# Altium PCB creative2016.PcbDoc
Units mil, origin at the board's own origin, x right, y up, seen from the top; angles counter-clockwise.
Board outline 6000 x 4000 mil, 2 copper layers (Top Layer, Bottom Layer); 79 components, 107 nets, 372 pads, 74 vias.
Unrouted connection lines stored in the file: 80.
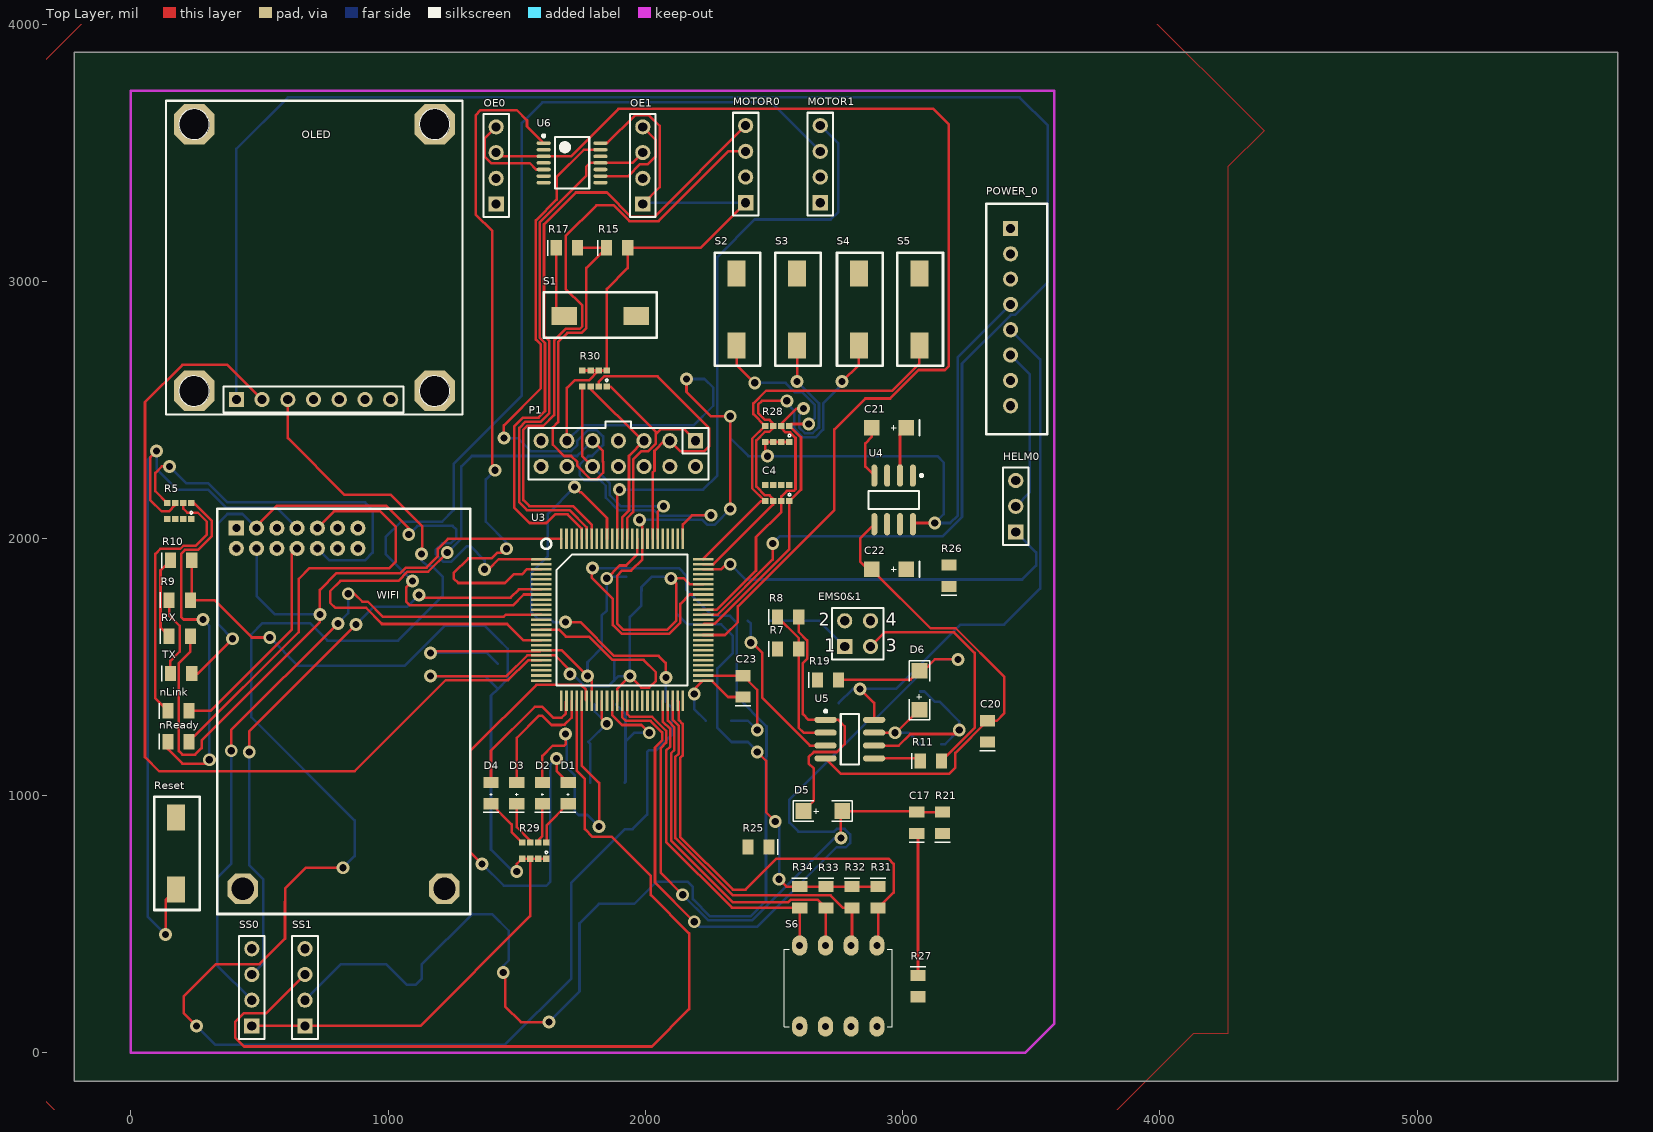
[diagram p0: Top Layer view]
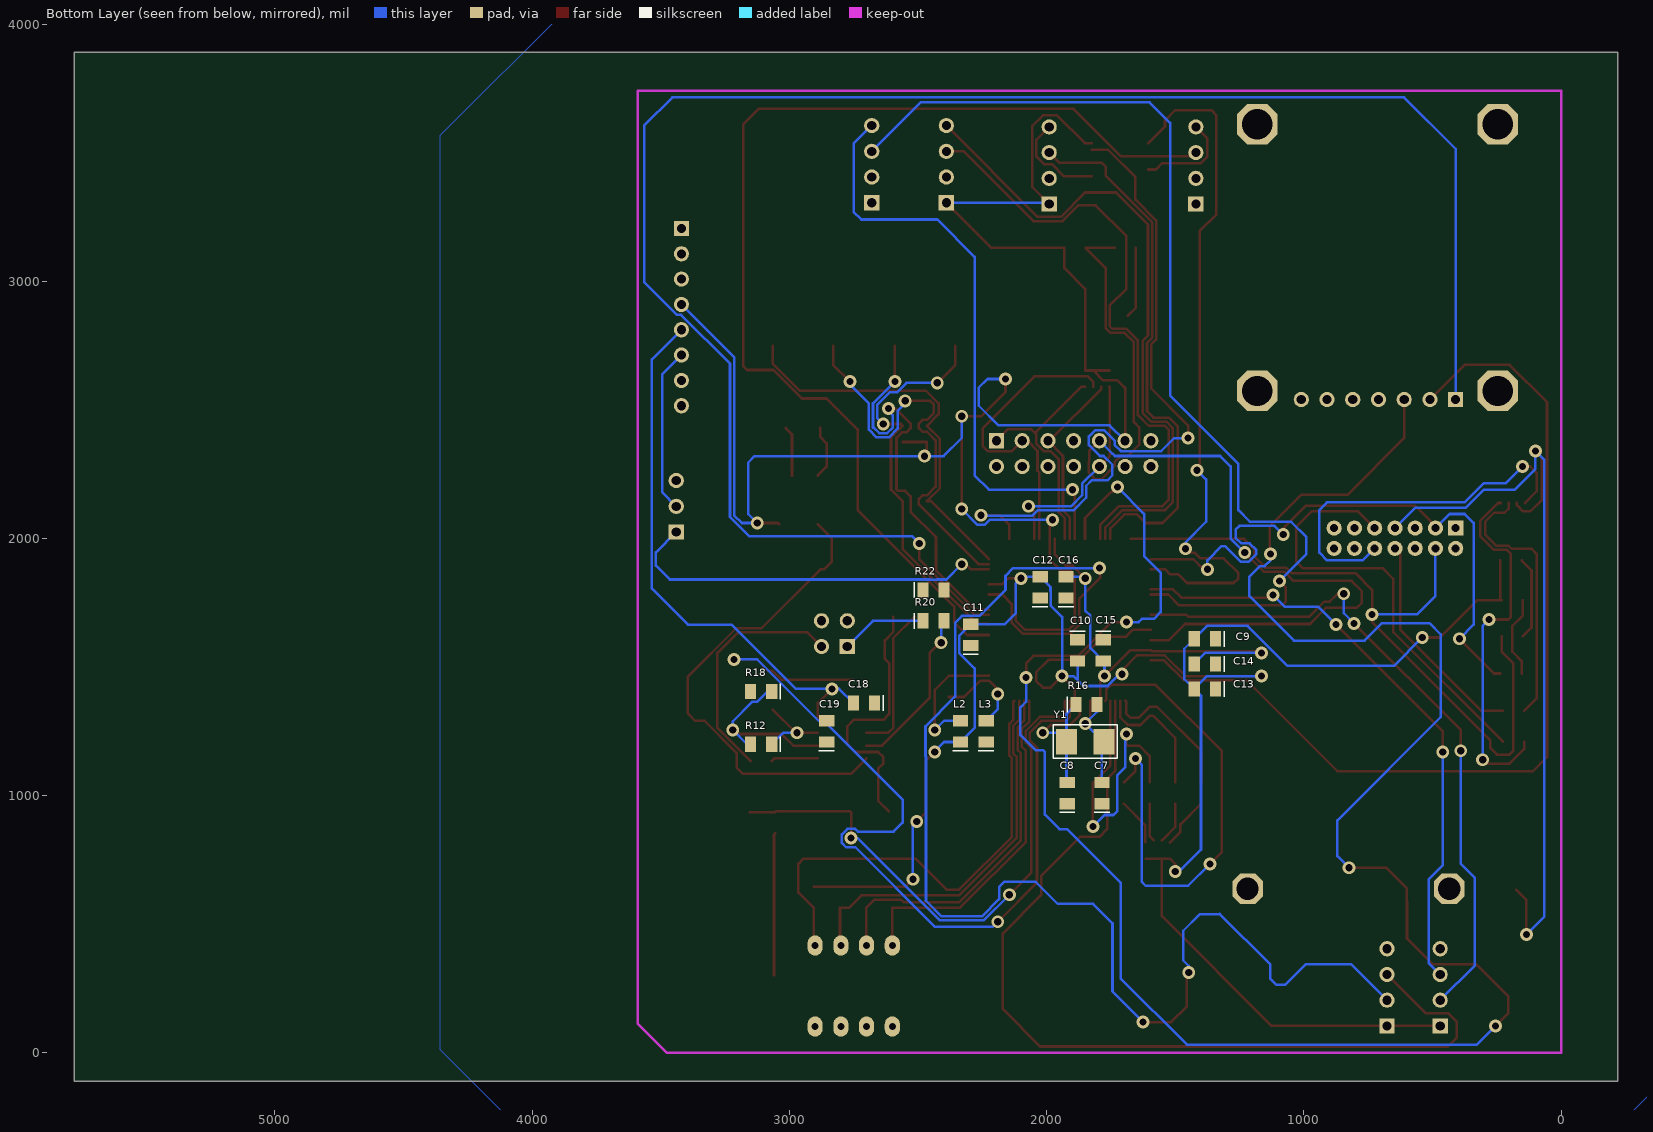
[diagram p1: Bottom Layer view, seen from below]

## Layer stack, top to bottom
Top Layer: signal copper 1.4
Dielectric: dielectric 12.6, FR-4, Dk 4.8
Bottom Layer: signal copper 1.4

## Board outline
-220,-110 5780,-110 5780,3890 -220,3890

## Design rules (kind name [scope] priority, off if disabled: settings)
Clearance [All] p1: gap=6
ComponentClearance [All] p1 off: gap=10 collisioncheckmode=3 verticalgap=10 showdistances=FALSE
MinimumSolderMaskSliver [All] p1: minsoldermaskwidth=1
PolygonConnect [All] p1: connectstyle=Relief reliefconductorwidth=10 reliefentries=4 polygonreliefangle="90 Angle" airgapwidth=10
RoutingVias [All] p1: holewidth=28 width=50 viastyle="Through Hole" minholewidth=28 minwidth=50 maxholewidth=28 maxwidth=50
SilkToSolderMaskClearance [IsPad] p1: minsilkscreentomaskgap=0 clearancetoexposedcopper=TRUE
SolderMaskExpansion [All] p1: expansion=4
Width [All] p1: maxlimit=10 minlimit=10 preferedwidth=10
25 further rules are at their usual default settings.

## Classes and differential pairs
component class WiFi: nLink nReady R5 R9 R10 Reset RX TX WIFI
component class Total: C4 C7 C8 C9 C10 C11 C12 C13 C14 C15 C16 C17 C18 C19 C20 C21 C22 C23 D1 D2 D3 D4 D5 D6 EMS0&1 HELM0 L2 L3 MOTOR0 MOTOR1 OE0 OE1 OLED P1 POWER_0 R7 R8 R11 R12 R15 R16 R17 R18 R19 R20 R21 R22 R25 R26 R27 R28 R29 R30 R31 R32 R33 R34 S1 S2 S3 S4 S5 S6 SS0 SS1 U3 U4 U5 U6 Y1

## Components (designator, comment, footprint, x,y, rotation, side; value= is the part's Value field where it differs from the comment)
C4 "Cap x4" 8P4R-0603 2560,2145 r180 top
C7 "Cap" "0805 2" 1785,1010 r90 bottom
C8 "Cap" "0805 2" 1920,1010 r90 bottom
C9 "Cap" "0805 2" 1385,1610 r0 bottom
C10 "Cap" "0805 2" 1880,1565 r270 bottom
C11 "Cap" "0805 2" 2295,1625 r90 bottom
C12 "Cap" "0805 2" 2025,1810 r90 bottom
C13 "Cap" "0805 2" 1385,1415 r0 bottom
C14 "Cap" "0805 2" 1385,1512.5 r0 bottom
C15 "Cap" "0805 2" 1780,1565 r270 bottom
C16 "Cap" "0805 2" 1925,1810 r90 bottom
C17 "Cap" "0805 2" 3055,895 r90 top
C18 "Cap" "0805 2" 2710,1360 r0 bottom
C19 "Cap" "0805 2" 2855,1250 r90 bottom
C20 "Cap" "0805 2" 3330,1250 r90 top
C21 "Cap Pol" "1206 Pol 3" 3015,2430 r180 top
C22 "Cap Pol" "1206 Pol 3" 3015,1880 r180 top
C23 "Cap" "0805 2" 2380,1425 r90 top
D1 "LED" "0805 Pol 3" 1700,1010 r90 top
D2 "LED" "0805 Pol 3" 1600,1010 r90 top
D3 "LED" "0805 Pol 3" 1500,1010 r90 top
D4 "LED" "0805 Pol 3" 1400,1010 r90 top
D5 "Diode" SMA 2690,940 r0 top
D6 "Diode" SMA 3065,1410 r90 top
EMS0&1 "Header 2X2" HDR2X2 2775,1580 r0 top
HELM0 "Header 3" HDR1X3 3440,2025 r90 top
L2 "Bead" "0805 2" 2335,1250 r90 bottom
L3 "Bead" "0805 2" 2235,1250 r90 bottom
MOTOR0 "Header 4" HDR1X4 2390,3305 r90 top
MOTOR1 "Header 4" HDR1X4 2680,3305 r90 top
nLink "LED" "0805 2" 185,1330 r0 top
nReady "LED" "0805 2" 185,1210 r0 top
OE0 "Header 4" HDR1X4 1420,3300 r90 top
OE1 "Header 4" HDR1X4 1990,3300 r90 top
OLED "Header 7X1" OLED-chiusir 1290,3705 r180 top
P1 "Header 7X2" "Header 2X7" 2195,2380 r180 top
POWER_0 "Header 8" XH2.54_8 3420,3205 r270 top
R5 "R x4" 8P4R-0603 235,2075 r180 top
R7 "Res" "0805 2" 2555,1570 r0 top
R8 "Res" "0805 2" 2555,1695 r0 top
R9 "Res" "0805 2" 190,1760 r0 top
R10 "Res" "0805 2" 195,1915 r0 top
R11 "Res" "0805 2" 3110,1135 r0 top
R12 "Res" "0805 2" 3110,1200 r0 bottom
R15 "Res" "0805 2" 1890,3130 r0 top
R16 "Res" "0805 2" 1845,1355 r180 bottom
R17 "Res" "0805 2" 1695,3130 r0 top
R18 "Res" "0805 2" 3110,1405 r0 bottom
R19 "Res" "0805 2" 2710,1450 r0 top
R20 "Res" "0805 2" 2440,1680 r180 bottom
R21 "Res" "0805 2" 3155,895 r90 top
R22 "Res" "0805 2" 2440,1800 r180 bottom
R25 "Res" "0805 2" 2440,800 r180 top
R26 "Res" "0805 2" 3180,1855 r90 top
R27 "Res" "0805 2" 3060,260 r270 top
R28 "R x4" 8P4R-0603 2560,2375 r180 top
R29 "R x4" 8P4R-0603 1615,755 r180 top
R30 "R x4" 8P4R-0603 1850,2590 r180 top
R31 "Res2" "0805 2" 2905,605 r270 top
R32 "Res2" "0805 2" 2803.33,605 r270 top
R33 "Res2" "0805 2" 2701.67,605 r270 top
R34 "Res2" "0805 2" 2600,605 r270 top
Reset "Switch-1" 轻触按键 175,635 r90 top
RX "LED" "0805 2" 190,1620 r0 top
S1 "Switch-1" 轻触按键 1965,2865 r180 top
S2 "Switch-1" 轻触按键 2355,2750 r90 top
S3 "Switch-1" 轻触按键 2590,2750 r90 top
S4 "Switch-1" 轻触按键 2830,2750 r90 top
S5 "Switch-1" 轻触按键 3065,2750 r90 top
S6 "SW-DIP4" Switch_4 2750,260 r180 top
SS0 "Header 4" HDR1X4 470,105 r90 top
SS1 "Header 4" HDR1X4 676.67,105 r90 top
TX "LED" "0805 2" 195,1475 r0 top
U3 "MPC5604BFMLL" LQ_LQFP100 1595,1920 r0 top
U4 "LM2662" SOIC-8 2965,2150 r270 top
U5 "NE5532" SOIC-8 2795,1220 r0 top
U6 "CD4013B" TSOP-14 1715,3460 r0 top
WIFI "Header 7X2" USR-WIFI232-X 335,2115 r270 top
Y1 "XTAL" "5032 2" 1850,1210 r0 bottom

## Footprints (in the part's own frame and the unit in brackets; to place one, negate y for a bottom-side part, rotate by r counter-clockwise, add the part's x,y. Pads: shape width x height; smd on the part's side, far side on the other; paste and mask are expansions set on the pad)
8P4R-0603 [mm]
  rect 0.64x0.6 smd: 1(0,0) 2(0,-1.6) 3(0.8,0) 4(0.8,-1.6) 5(1.6,0) 6(1.6,-1.6) 7(2.4,0) 8(2.4,-1.6)
  silkscreen extent -0.13,-0.76 0.13,-0.51
"0805 2" [mm] "Chip Resistor; Body 2.0 x 1.3 mm (LxW typ)"
  rect 1.1x1.5 smd: 1(-1.05,0) 2(1.05,0)
  silkscreen extent -1.91,-0.76 -1.91,0.76
"0805 Pol 3" [mm] "Chip Resistor; Body 2.0 x 1.3 mm (LxW typ)"
  rect 1.1x1.5 smd: 1(-1.05,0) 2(1.055,0)
  silkscreen extent -1.91,-0.76 0,0.76
"1206 Pol 3" [mil]
  rect 60x60 smd: 1(0,0) 2(135,0)
  silkscreen extent -50,-30 60,30
"5032 2" [mil]
  rect 80x100 smd: 1(-72.83,0) 2(72.83,0)
  silkscreen extent -125,-65 125,65
HDR1X3 [mm] "Connector; Header; 3 Position"
  rect 1.5x1.5 hole 0.9: 1(0,0)
  round 1.5 hole 0.9: 2(2.54,0) 3(5.08,0)
  silkscreen extent -1.27,-1.27 6.35,1.27
HDR1X4 [mm] "Connector; Header; 4 Position"
  rect 1.5x1.5 hole 0.9: 1(0,0)
  round 1.5 hole 0.9: 2(2.54,0) 3(5.08,0) 4(7.62,0)
  silkscreen extent -1.27,-1.27 8.89,1.27
HDR2X2 [mm] "Connector; Header; 2x2 Position"
  rect 1.5x1.5 hole 0.9: 1(0,0)
  round 1.5 hole 0.9: 2(0,2.54) 3(2.54,0) 4(2.54,2.54)
  silkscreen extent -1.27,-1.27 3.81,3.81
"Header 2X7" [mm] "Connector; Header; 7x2 Position"
  rect 1.5x1.5 hole 0.9: 1(0,0)
  round 1.5 hole 0.9: 2(0,2.54) 3(2.54,0) 4(2.54,2.54) 5(5.08,0) 6(5.08,2.54) 7(7.62,0) 8(7.62,2.54) 9(10.16,0) 10(10.16,2.54) 11(12.7,0) 12(12.7,2.54) 13(15.24,0) 14(15.24,2.54)
  silkscreen extent -1.27,-1.9 16.51,3.81
LQ_LQFP100 [mm]
  oval 2x0.254 smd: 1(0,0)
  rect 2x0.254 smd: 2(0,-0.5) 3(0,-1) 4(0,-1.5) 5(0,-2) 6(0,-2.5) 7(0,-3) 8(0,-3.5) 9(0,-4) 10(0,-4.5) 11(0,-5) 12(0,-5.5) 13(0,-6) 14(0,-6.5) 15(0,-7) 16(0,-7.5) 17(0,-8) 18(0,-8.5) 19(0,-9) 20(0,-9.5) 21(0,-10) 22(0,-10.5) 23(0,-11) 24(0,-11.5) 25(0,-12) 51(16,-12) 52(16,-11.5) 53(16,-11) 54(16,-10.5) 55(16,-10) 56(16,-9.5) 57(16,-9) 58(16,-8.5) 59(16,-8) 60(16,-7.5) 61(16,-7) 62(16,-6.5) 63(16,-6) 64(16,-5.5) 65(16,-5) 66(16,-4.5) 67(16,-4) 68(16,-3.5) 69(16,-3) 70(16,-2.5) 71(16,-2) 72(16,-1.5) 73(16,-1) 74(16,-0.5) 75(16,0)
  rect 0.254x2 smd: 26(2,-14) 27(2.5,-14) 28(3,-14) 29(3.5,-14) 30(4,-14) 31(4.5,-14) 32(5,-14) 33(5.5,-14) 34(6,-14) 35(6.5,-14) 36(7,-14) 37(7.5,-14) 38(8,-14) 39(8.5,-14) 40(9,-14) 41(9.5,-14) 42(10,-14) 43(10.5,-14) 44(11,-14) 45(11.5,-14) 46(12,-14) 47(12.5,-14) 48(13,-14) 49(13.5,-14) 50(14,-14) 76(14,2) 77(13.5,2) 78(13,2) 79(12.5,2) 80(12,2) 81(11.5,2) 82(11,2) 83(10.5,2) 84(10,2) 85(9.5,2) 86(9,2) 87(8.5,2) 88(8,2) 89(7.5,2) 90(7,2) 91(6.5,2) 92(6,2) 93(5.5,2) 94(5,2) 95(4.5,2) 96(4,2) 97(3.5,2) 98(3,2) 99(2.5,2) 100(2,2)
  silkscreen extent 0,-12.46 14.46,2
OLED-chiusir [mm]
  oct 4x4 hole 3: 0(2.778,28.745) 0(2.778,2.395) 0(26.528,28.745) 0(26.528,2.395)
  rect 1.5x1.5 hole 0.9: 1(22.352,29.591)
  round 1.5 hole 0.9: 2(19.812,29.591) 3(17.272,29.591) 4(14.732,29.591) 5(12.192,29.591) 6(9.652,29.591) 7(7.112,29.591)
  silkscreen extent 0,0.08 29.3,31.06
SMA [mm] "Chip Resistor; Body 2.0 x 1.3 mm (LxW typ)"
  rect 1.555x1.57 smd: 1(-1.915,0) 2(1.915,0)
  silkscreen extent -2.92,-1.02 2.92,1.02
SOIC-8 [mm] "SOIC, 8-Leads, Body 4.90x3.90mm, Pitch 1.27mm, IPC Medium Density"
  oval 2.2x0.6 smd: 1(-2.4,1.905) 2(-2.4,0.635) 3(-2.4,-0.635) 4(-2.4,-1.905) 5(2.4,-1.905) 6(2.4,-0.635) 7(2.4,0.635) 8(2.4,1.905)
  silkscreen extent -2.52,-2.5 0.9,2.88
Switch_4 [mm] "拨码开关"
  oval 1.5x2 hole 0.7: 1(-3.81,4) 2(-1.27,4) 3(1.27,4) 4(3.81,4) 5(3.81,-4) 6(1.27,-4) 7(-1.27,-4) 8(-3.81,-4)
  silkscreen extent -5.33,-3.62 5.33,4
TSOP-14 [mm] "TSOP, 14-Leads, Body 5.00x4.40mm, Pitch 0.65mm, IPC High Density"
  oval 1.4x0.35 smd: 1(-2.8,1.95) 2(-2.8,1.3) 3(-2.8,0.65) 4(-2.8,0) 5(-2.8,-0.65) 6(-2.8,-1.3) 7(-2.8,-1.95) 8(2.8,-1.95) 9(2.8,-1.3) 10(2.8,-0.65) 11(2.8,0) 12(2.8,0.65) 13(2.8,1.3) 14(2.8,1.95)
  silkscreen extent -2.92,-2.55 1.7,2.8
USR-WIFI232-X [mm]
  oct 3x3 hole 2.2: 0(37.5,22.45) 0(37.5,2.55)
  rect 1.5x1.5 hole 0.8: 1(1.9,1.9)
  round 1.5 hole 0.8: 2(3.9,1.9) 3(1.9,3.9) 4(3.9,3.9) 5(1.9,5.9) 6(3.9,5.9) 7(1.9,7.9) 8(3.9,7.9) 9(1.9,9.9) 10(3.9,9.9) 11(1.9,11.9) 12(3.9,11.9) 13(1.9,13.9) 14(3.9,13.9)
  silkscreen extent 0,0 40,25
XH2.54_8 [mm]
  rect 1.5x1.5 hole 0.9: 1(0,0)
  round 1.5 hole 0.9: 2(2.5,0) 3(5,0) 4(7.5,0) 5(10,0) 6(12.5,0) 7(15,0) 8(17.5,0)
  silkscreen extent -2.45,-2.4 20.32,3.6
轻触按键 [mil]
  rect 100x70 smd: 1(0,0) 2(280,0)
  silkscreen extent -79,-92 361,85

## Part data
C7 C8 C9 C10 C11 C12 C13 C14 C15 C16 C17 C18 C19 C20 C23: "Capacitor"
C21 C22: "Polarized Capacitor (Radial)"
D5 D6: "3 Amp General Purpose Rectifier"
EMS0&1: "Header, 2-Pin, Dual row"
HELM0: "Header, 3-Pin"
MOTOR0 MOTOR1 OE0 OE1 SS0 SS1: "Header, 4-Pin"
OLED: library part OLED-chiusir
P1: "Header, 7-Pin, Dual row"
POWER_0: "Header, 8-Pin"
R5 R28 R29 R30: library part "Res x4"
R7 R8 R9 R10 R11 R12 R15 R16 R17 R18 R19 R20 R21 R22 R25 R26 R27 R31 R32 R33 R34: "Resistor"
S6: library part SWITCH-4
U6: "CMOS Dual 'D'-Type Flip-Flop"
WIFI: library part USR-WIFI232-X
Y1: "Crystal Oscillator"

## Via types
v1: diameter 50, hole 28, Top Layer to Bottom Layer, 74 vias

## Nets (pads, with @x,y where several pads share a name; then routed paths per layer and width w, separated by ;. In a path a pad name is that pad's centre, name@x,y a point inside that pad or via, vN(x,y) a via of type N, cw(c..) or ccw(c..) an arc to the next point about the centre after c; other vN are vias at no path point)
BAT_3.3(1): OLED.6 POWER_0.2 R5.1 R5.3 R5.5 R5.7 WIFI.2
BAT_3.3(2): POWER_0.3
BAT_5(1): C9.2 C10.2 C11.2 C12.2 C13.2 L2.1 MOTOR0.1 MOTOR1.1 OE0.1 OE1.1 P1.11 POWER_0.4 R9.2 R10.2 R15.2 R28.1 R28.3 R28.5 R28.7 R29.1 R29.3 R29.5 R29.7 R30.2 R30.4 R30.6 R30.8 R31.1 R32.1 R33.1 R34.1 SS0.1 SS1.1 U3.15 U3.20 U3.37 U3.70 U3.84 U4.8 U6.14 | length 16430.7
  Top Layer w10: R10.2 236.34,1765 R9.2 325,1760 470,1615 v1(540,1615) ; SS0.1 SS1.1 1125,105 1552.01,532.01 R29.5 ; v1(1165,1465) 1460,1465 1540.99,1545.99 U3.20 1649.01,1545.99 1707.5,1487.5 v1(1707.5,1472.5) ; v1(1500,705) 1500,734.49 R29.7 R29.5 ; U3.15 1665.59,1644.41 1691.31,1618.69 1781.06,1618.69 1871.75,1528 1992.91,1528 2041,1479.91 2041,1446 2015,1420 1985,1420 v1(1940,1465) 1890.28,1415.28 U3.37 ; R29.1 R29.3 R29.5 ; P1.11 1695,2585 1725,2615 1780.51,2615 R30.4 ; R30.8 R30.6 R30.4 ; U6.14 1851.77,3536.77 1960,3645 2015,3645 2056,3604 2056,3366 OE1.1 ; v1(1977.5,2072.5) 1977.5,2067.5 1988.7,2056.3 U3.84 1988.7,1918.7 1945,1875 1910,1875 1890,1855 1890,1670 1915,1645 2085,1645 2120,1680 2120,1825 v1(2100,1845) 2150,1845 2173.42,1821.58 U3.70 ; v1(2160,2620) 2160,2570 2255,2475 v1(2330,2475) v1(2330,2114.09) ; MOTOR0.1 2215,3130 R15.2 1931.34,3051.34 1850,2970 R30.2 R30.4 ; v1(2435,1170) 2470,1135 2470,935 v1(2505,900) ; v1(2475,2320) 2465.51,2329.49 R28.7 R28.5 R28.3 R28.1 ; v1(2520,675) 2548.66,646.34 R34.1 R33.1 R32.1 R31.1 ; U4.8 3044.49,2060 v1(3125,2060)
  Bottom Layer w10: v1(540,1615) 650,1505 1064.09,1505 1219.09,1660 1376.34,1660 C9.2 1465,1571.34 1465,1453.66 C13.2 ; v1(1165,1465) 1376.34,1465 C13.2 ; v1(1500,705) 1485,705 1400,790 1400,1388.66 C13.2 ; P1.11 1755,2440 2188,2440 2264,2516 2264,2586 2230,2620 v1(2160,2620) ; v1(1707.5,1472.5) 1716.59,1472.5 1762.59,1426.5 1857.41,1426.5 1878.5,1447.59 ; C10.2 1878.5,1522.16 1878.5,1447.59 ; v1(1977.5,2072.5) 2221.59,2072.5 2240.09,2054 2269.91,2054 v1(2330,2114.09) v1@2330,2115 ; OE1.1 1995,3305 MOTOR0.1 ; v1(2330,2475) 2330,2391 2401,2320 v1(2475,2320) 3135,2320 3160,2295 3160,2095 v1(3125,2060) 3185,2060 3215,2090 3215,2704.72 POWER_0.4 ; v1@2432.32,1175 2398.66,1208.66 L2.1 2280,1263.66 2280,1495 2340,1555 2340,1621.34 C11.2 2163.66,1666.34 2120,1710 2120,1825 v1(2100,1845) 2093.66,1851.34 C12.2 1985,1811.34 1985,1795.93 1984.47,1795.4 1984.47,1739.47 1940,1695 v1(1940,1465) 1895.91,1465 1878.5,1447.59 ; v1(2505,900) 2520,885 v1(2520,675)
BAT_5(2): C18.2 POWER_0.5 U5.8 | length 2164.5
  Top Layer w10: v1(2835,1415) 2889.49,1360.51 U5.8
  Bottom Layer w10: C18.2 2806.34,1415 v1(2835,1415) 2975,1415 3225,1665 3395,1665 3535,1805 3535,2696.3 POWER_0.5
BAT_6(1): HELM0.2 POWER_0.6 | length 641.7
  Bottom Layer w10: POWER_0.6 3495,2637.87 3495,2180 HELM0.2
BAT_6(2): POWER_0.7
BAT_7.2: POWER_0.1
BAT_-5: C20.2 C22.2 U4.5 U5.4 | length 1905.9
  Top Layer w10: U5.4 2760.51,1085 3180,1085 3205,1110 3205,1166.34 C20.2 3366.34,1291.34 3395,1320 3395,1462.63 3206.63,1651 3109,1651 C22.2 2865,1880 2835,1910 2835,2000.51 U4.5
EXTAL: C8.2 R16.1 U3.36 Y1.2 | length 654.2
  Top Layer w10: U3.36 1870.59,1314.41 1910,1275 1985,1275 v1(2015,1245)
  Bottom Layer w10: R16.1 1922.83,1318.5 Y1.2 ; C8.2 1922.83,1054.17 Y1.2 ; v1(2015,1245) 1957.83,1245 Y1.2
GND: C4.2 C4.4 C4.6 C4.8 C7.1 C8.1 C9.1 C10.1 C11.1 C12.1 C13.1 C14.1 C15.1 C16.1 C22.1 HELM0.3 L3.1 MOTOR0.2 MOTOR1.2 OE0.2 OE1.2 OLED.7 P1.2 P1.4 P1.6 P1.8 P1.12 P1.14 POWER_0.8 R22.2 R25.2 R26.2 R27.2 Reset.2 S1.1 S2.2 S3.2 S4.2 S5.2 S6.1 S6.2 S6.3 S6.4 SS0.4 SS1.4 U3.14 U3.16 U3.18 U3.33 U3.35 U3.69 U3.83 U3.86 U4.3 U4.6 U6.4 U6.6 U6.7 U6.8 U6.10 WIFI.1
GND_ANALOG: C17.1 C18.1 C19.1 C20.1 EMS0&1.2 EMS0&1.4 R7.1 R18.2 R19.1 R21.1 R22.1 R25.1 R26.1 R27.1 | length 554.4
  Top Layer w10: C17.1 3060,848.66 R27.1
MCU_RDY: P1.13
NetC21_1: C21.1 U4.2 | length 195.9
  Top Layer w10: U4.2 2990,2405 C21.1
NetC21_2: C21.2 U4.4 | length 210.4
  Top Layer w10: C21.2 2880,2395 2855,2370 2855,2279.49 U4.4
NetD1_1: D1.1 R29.2 | length 184.5
  Top Layer w10: R29.2@1616,818.99 1616,884.66 D1.1
NetD2_1: D2.1 R29.4 | length 149
  Top Layer w10: R29.4@1583.5,826.46 1600,842.96 D2.1
NetD3_1: D3.1 R29.6 | length 163.7
  Top Layer w10: D3.1 1500,878.47 R29.6@1552.01,826.46
NetD4_1: D4.1 R29.8 | length 200.6
  Top Layer w10: D4.1 1480,888.66 1480,858.5 R29.8
NetD5_1: D5.1 R8.2 U5.1 | length 1045.9
  Top Layer w10: R8.2 2596.34,1636.74 2628.99,1604.08 2628.99,1531.65 2612.34,1515 2612.34,1317.66 2635,1295 U5.1 2750,1295 2775,1270 2775,1200 2745,1170 2655,1170 2635,1150 2635,1125 2655,1105 2655,980.39 D5.1
NetD6_1: D6.1 R12.1 U5.7 | length 329.9
  Top Layer w10: U5.7 v1(2970,1245) 2975.39,1245 D6.1
  Bottom Layer w10: v1(2970,1245) 3023.66,1245 R12.1
NetEMS0&1_1: EMS0&1.1 R20.1 | length 335.1
  Bottom Layer w10: R20.1 2675,1680 EMS0&1.1
NetEMS0&1_3: EMS0&1.3 R11.2 | length 934.2
  Top Layer w10: EMS0&1.3 2930,1635 3200,1635 3280,1555 3280,1263.97 3151.34,1135.3 R11.2
NetnLink_1: nLink.1 R5.4 | length 1045.5
  Top Layer w10: nLink.1 95,1378.66 95,1940 115,1960 191.97,1960 203.5,1971.53 251.53,1971.53 295,2015 295,2065 260,2100 220,2100 203.5,2116.5 R5.4
NetnLink_2: nLink.2 WIFI.8 | length 854.3
  Top Layer w10: nLink.2 310,1330 625,1645 625,1940.43 WIFI.8
NetnReady_1: nReady.1 R5.2 | length 1425
  Top Layer w10: nReady.1 143.66,1181.34 200,1125 290,1125 v1(305,1140) ; R5.2 244.64,2137.99 315,2067.63 315,2010 260.53,1955.53 210.13,1955.53 203.68,1949.08 203.68,1948.68 195,1940 195,1695 205,1685 v1(280,1685)
  Bottom Layer w10: v1(280,1685) 305,1660 v1(305,1140)
NetnReady_2: nReady.2 WIFI.9 | length 1706.4
  Top Layer w10: nReady.2 652.5,1636.16 652.5,1842.5 695,1885 1005,1885 1030,1910 1030,2045 970,2105 789.57,2105 WIFI.9
NetOE0_4: OE0.4 U6.5 | length 384.4
  Top Layer w10: OE0.4 1375,3555 1375,3485 1400.53,3459.47 1550.53,3459.47 1575.59,3434.41 U6.5
NetOE1_4: OE1.4 U6.9 | length 382
  Top Layer w10: U6.9 1933.82,3408.82 1980,3455 2010,3455 2040,3485 2040,3550 OE1.4
NetR5_6: R5.6 Reset.1 WIFI.7 | length 3160.9
  Top Layer w10: v1(100,2340) 75,2315 75,2150 120,2105 147.49,2105 172.01,2129.52 R5.6 ; v1(135,460) 135,595 Reset.1
  Bottom Layer w10: v1(135,460) 65,530 65,2305 v1(100,2340) 100,2270 180,2190 300,2190 370,2120 566.22,2120 WIFI.7
NetR5_8: R5.8 WIFI.10 | length 1473.5
  Top Layer w10: R5.8 95,2183.5 95,2255 120,2280 v1(150,2280)
  Bottom Layer w10: v1(150,2280) 215,2215 300,2215 375,2140 910,2140 940,2110 940,1945 910,1915 771.22,1915 WIFI.10
NetR7_2: R7.2 R8.1 U5.2 | length 577.5
  Top Layer w10: R8.1 2596.34,1612.32 R7.2 2596.34,1263.66 2615,1245 U5.2
NetR9_1: R9.1 TX.1 | length 317.2
  Top Layer w10: R9.1 148.66,1701.34 190,1660 190,1560 153.66,1523.66 TX.1
NetR10_1: R10.1 RX.1 | length 325
  Top Layer w10: RX.1 115,1653.66 115,1876.34 R10.1
NetR11_1: R11.1 U5.5 | length 183.3
  Top Layer w10: U5.5 3058.66,1145 R11.1
NetR12_2: R12.2 R18.1 U5.6 | length 680.5
  Top Layer w10: U5.6 2985,1195 3030,1240 3205,1240 v1(3220,1255)
  Bottom Layer w10: R18.1 3084.6,1405 3125.13,1364.47 3145,1364.47 3220,1289.47 v1(3220,1255) 3165,1200 R12.2
NetR17_1: R17.1 S1.2 | length 278
  Top Layer w10: R17.1 1653.66,2896.34 S1.2
NetR20_2: R20.2 U5.3 | length 648.4
  Top Layer w10: v1(2410,1595) 2415,1595 2455,1555 2455,1380 2640,1195 U5.3
  Bottom Layer w10: R20.2 2410,1668.66 v1(2410,1595)
PA0: SS0.2 U3.12 | length 2638
  Top Layer w10: v1(390,1175) 390,1255 v1(805,1670) ; v1(845,1785) 869.09,1785 900.09,1754 921,1754 980,1695 1448.07,1695 1456.53,1703.47 U3.12
  Bottom Layer w10: v1(390,1175) 390,735 335,680 335,340 SS0.2 ; v1(805,1670) 845,1710 v1(845,1785)
PA1: SS0.3 U3.7 | length 2358.3
  Top Layer w10: v1(460,1170) 460,1250 v1(875,1665) ; v1(1120,1780) 1125,1780 1135,1770 1476.22,1770 1508.11,1801.89 U3.7
  Bottom Layer w10: v1(460,1170) 460,730 515,675 515,350 SS0.3 ; v1(875,1665) 945,1735 1075,1735 v1(1120,1780)
PA3: SS1.2 U3.68 | length 5430.3
  Top Layer w10: v1(1447.5,312.5) 1455,305 1455,181 1516,120 v1(1625,120) ; v1(1795,1885) 1792,1882 1792,1847 1874,1765 1874,1663.37 1908.37,1629 2091.63,1629 2136,1673.37 2136,1746 2172.21,1782.21 U3.68
  Bottom Layer w10: SS1.2 817.19,345.53 992.16,345.53 1073.21,264.47 1106.79,264.47 1130.53,288.21 1130.53,343.16 1327.37,540 1328.37,539 1405,539 1469,475 1469,360 1447.5,338.5 v1(1447.5,312.5) ; v1(1625,120) 1744,239 1744,504 1819.47,579.47 1956.79,579.47 2042.31,665 2165,665 2185,645 2185,597.63 2251.63,531 2408.37,531 2469,591.63 2469,1152.09 2471,1154.09 2471,1269.91 2356,1384.91 2356,1672.08 2329.08,1698.99 2261.01,1698.99 2160,1800 2160,1855 2130,1885 v1(1795,1885)
PA4: SS1.3 U3.29 | length 3671.7
  Top Layer w10: SS1.3 526.67,155 440,155 405,120 405,60 440,25 2025,25 2170,170 2170,465 2021.5,613.5 2021.5,688.5 1870,840 1795,840 1765,870 1765,1065 1732.8,1097.2 U3.29
PA8: U3.72
PA9: HELM0.1 U3.73 | length 1512.5
  Top Layer w10: U3.73 2295.63,1880.63 2315,1900 v1(2330,1900)
  Bottom Layer w10: v1(2330,1900) 2389.47,1840.53 2424.87,1840.53 2425.4,1840 2454.6,1840 2455.13,1840.53 3464.53,1840.53 3519,1895 3519,1946 HELM0.1
PA10: C4.5 R28.6 S4.1 U3.74 | length 1625.8
  Top Layer w10: U3.74 2265.16,1900.32 2497.01,2132.16 C4.5 2497.01,2153.47 2482.67,2167.81 2465.73,2167.81 2431.57,2201.97 2431.57,2381.42 2465.07,2414.93 2482.41,2414.93 2497.01,2429.52 R28.6 2497.01,2446.46 2482.67,2460.8 2465.33,2460.8 2438.07,2488.07 2438.07,2520.44 2452.63,2535 v1(2550,2535) ; v1(2765,2610) 2830,2675 S4.1
  Bottom Layer w10: v1(2550,2535) 2550,2525 2579,2496 2579,2427.46 2613.46,2393 2660.63,2393 2691,2423.37 2691,2525 2765,2599 v1(2765,2610)
PA11: C4.7 R28.8 S5.1 U3.75 | length 1554.1
  Top Layer w10: U3.75 2449.92,2145 C4.7 2415.51,2195 2415.51,2387.99 R28.8 2420,2483.5 2420,2525 2470,2575 2471,2574 2959,2574 3065,2680 S5.1
PA12: D1.2 U3.31 | length 1975.1
  Top Layer w10: v1(1365,735) 1320,780 1320,1175 1576,1431 1750.23,1431 1768.48,1412.75 1768.48,1372.51 U3.31 ; v1(1655,1145) 1655,1096.54 D1.2
  Bottom Layer w10: v1(1365,735) 1450,650 1615,650 1631,666 1631,1121 v1(1655,1145)
PA13: D2.2 U3.30 | length 1203.2
  Top Layer w10: D2.2 1600,1155 1640,1195 1685,1195 1690,1200 v1(1690,1240) ; U3.30 1752.48,1117.52 1820,1050 v1(1820,880)
  Bottom Layer w10: v1(1690,1240) 1695,1235 1695,1110 1725,1080 1725,940 1740,925 1775,925 v1(1820,880)
PA14: D3.2 U3.28 | length 513.6
  Top Layer w10: D3.2 1500,1225 1585,1310 1600,1310 1635,1275 1674.09,1275 1675.09,1276 1686,1276 1713.11,1303.11 U3.28
PA15: D4.2 U3.27 | length 558.7
  Top Layer w10: D4.2 1400,1175 1570,1345 1600,1345 1641.29,1303.71 1675,1303.71 1689.74,1318.45 1689.74,1365.13 U3.27
PB0: U3.23
PB1: U3.24
PB2: RX.2 U3.100 WIFI.4 | length 2873.9
  Top Layer w10: RX.2 231.34,1560.02 186.32,1515 186.32,1173.68 200,1160 250,1160 275,1185 275,1215 735,1675 v1(735,1705) 735,1800 800,1865 1047.37,1865 1069.37,1887 1149.37,1887 1193.69,1931.31 1193.69,1959.6 1232.83,1998.74 U3.100
  Bottom Layer w10: WIFI.4 488.54,1776.46 560,1705 v1(735,1705)
PB3: TX.2 U3.1 WIFI.3 | length 2441.8
  Top Layer w10: TX.2 260,1475 v1(395,1610) ; WIFI.3 488.54,2048.54 567.5,2127.5 992.5,2127.5 1080,2040 v1(1080,2015) ; v1(1375,1880) 1390,1880 1430,1920 U3.1
  Bottom Layer w10: v1(395,1610) 340,1665 340,2060 375,2095 433.74,2095 WIFI.3 ; v1(1080,2015) 1114,2049 1251,2049 1265,2035 1265,2002.63 1243.37,1981 1211,1981 1185,1955 1185,1939.09 1215.09,1909 1244.91,1909 1305.91,1970 1320,1970 1375,1915 v1(1375,1880)
PB4: U3.50
PB5: U3.53
PB6: U3.54
PB7: U3.55
PB8: C17.2 D5.2 R21.2 U3.39 | length 2198.4
  Top Layer w10: U3.39 1929.65,1317.35 1940,1307 2026.54,1307 2081,1252.54 2081,1206 2060,1185 2060,700 v1(2145,615) ; v1(2760,835) 2760,934.61 D5.2 3051.34,940 C17.2 R21.2
  Bottom Layer w10: v1(2145,615) 2245,515 2415,515 2735,835 v1(2760,835)
PB9: C19.2 D6.2 R19.2 U3.38 | length 3575.8
  Top Layer w10: U3.38 1909.96,1305.04 1924,1291 2019.91,1291 2065,1245.91 2065,1215 2037.5,1187.5 2037.5,662.5 v1(2190,510) ; R19.2 2752.34,1451 3030.61,1451 D6.2 3080.39,1485.39 3125,1530 v1(3215,1530)
  Bottom Layer w10: v1(2190,510) 2210,490 2434.09,490 2744.09,800 2745.09,799 2779,799 2796,816 2796,849.91 2774.91,871 2745.09,871 2734.09,860 2595,860 2560,895 2560,985 2855,1280 C19.2 2886.34,1291.34 3125,1530 v1(3215,1530)
PB10: U3.40
PB11: U3.59
PB12: U3.61
PB13: U3.63
PB14: C4.3 R28.4 S3.1 U3.65 | length 1592.8
  Top Layer w10: U3.65 2278.15,1723.15 2430,1875 2430,2005 2528.5,2103.5 C4.3 2528.5,2163.5 2550.18,2185.18 2577.15,2185.18 2583.6,2191.62 2583.6,2391.37 2562.68,2412.28 2562.68,2412.68 2545.34,2412.68 2528.5,2429.52 R28.4 2528.5,2446.46 2587.04,2505 v1(2615,2505) ; v1(2590,2610) S3.1
  Bottom Layer w10: v1(2590,2610) 2675,2525 2675,2430 2670.91,2430 2649.91,2409 2620.09,2409 2599,2430.09 2599,2479 2615,2495 v1(2615,2505)
PB15: U3.67
PC0: P1.1 R30.1 U3.87 | length 922.1
  Top Layer w10: R30.1 1865,2590 2040,2415 2040,2405 ; U3.87 1929.65,2079.39 1952.31,2102.06 1952.31,2306.79 1985,2339.47 2011.79,2339.47 2040,2367.69 2040,2405 ; P1.1 2150,2425 2060,2425 2040,2405
PC1: P1.3 R30.3 U3.82 | length 1210.4
  Top Layer w10: R30.3 1818.5,2608.69 1840,2630.18 2047.19,2630.18 2249,2428.37 2249,2359.39 2229.08,2339.47 2135.53,2339.47 P1.3 2074.94,2380 2035.53,2340.59 2035.53,2263.21 2028.07,2255.76 U3.82
PC2: OLED.5
PC5: OLED.3 U3.91 | length 8604.4
  Top Layer w10: v1(255,105) 205,155 205,220 330.53,345.53 500.53,345.53 599,444 599,587.63 600,588.63 600,640 680,720 v1(825,720) ; OLED.3 610,2390.37 830.9,2169.47 1010.53,2169.47 1132,2048 1132,1942 v1(1130,1940) ; v1(1690,1675) 1747.37,1675 1878.37,1544 2051,1544 2079,1516 2079,1461 v1(2080,1460) ; v1(1725,2200) 1745,2180 1750,2180 1850.91,2079.09 U3.91
  Bottom Layer w10: v1(255,105) 327.53,32.47 1455.04,32.47 1712,289.43 1712,661.75 1920.44,870.19 1950.44,870.19 2007,926.75 2007,1170 2014,1177 2043.17,1177 2102,1235.83 2102,1343.25 2080,1365.25 v1(2080,1460) ; v1(825,720) 870,765 870,903.54 467.91,1305.63 467.91,1626.91 511.73,1670.73 695.73,1670.73 763.46,1603 1039.17,1603 1212,1775.83 1212,1851.54 1171.23,1892.31 1152.69,1892.31 1130,1915 v1(1130,1940) ; v1(1690,1675) 1642.63,1675 1630,1687.63 1582.63,1687.63 1557,1713.25 1557,1867 1621,1931 1621,2096 v1(1725,2200)
PC10: U3.22
PC11: OLED.2 U3.21 | length 3692.4
  Top Layer w10: OLED.2 375,2675 200,2675 55,2530 55,1150 110,1095 870,1095 1224,1449 1466.63,1449 1543.93,1526.3 U3.21
PC12: U3.97
PC13: U3.98
PC14: U3.3 U6.1 | length 2737.6
  Top Layer w10: v1(1415,2265) 1405,2275 1405,3195 1340,3260 1340,3645 1360,3665 1500,3665 1540,3625 1540,3601.54 U6.1 ; v1(1460,1960) 1445,1945 1425,1945 1402.5,1922.5 1312.5,1922.5 1255,1865 1255,1845 1273,1827 1454.37,1827 1488,1860.63 1520,1860.63 1540,1880.63 U3.3
  Bottom Layer w10: v1(1415,2265) 1380,2230 1380,2065 1460,1985 v1(1460,1960)
PC15: U3.4
PD0: U3.41
PD1: U3.42
PD2: U3.43
PD3: U3.44
PD4: U3.45
PD5: R34.2 S6.5 U3.46 | length 1339.1
  Top Layer w10: U3.46 2067.44,1288.73 2097,1259.17 2097,1191 2081,1175 2081,820 2336,565 2598.66,565 R34.2 S6.5
PD6: R33.2 S6.6 U3.47 | length 1426.1
  Top Layer w10: U3.47 2087.13,1291.67 2113,1265.79 2113,1178 2100,1165 2100,825 2340,585 2554.6,585 2565.92,596.32 2669.01,596.32 R33.2 2701.67,419.15 S6.6
PD7: R32.2 S6.7 U3.48 | length 1491
  Top Layer w10: U3.48 2106.81,1294.61 2129,1272.42 2129,1163 2116,1150 2116,835 2117.32,835 2340,612.32 2719.75,612.32 2768.4,563.66 R32.2 S6.7@2803.33,420.81
PD8: R31.2 S6.8 U3.49 | length 1850.9
  Top Layer w10: U3.49 2130.18,1365.14 2130.18,1293.87 2145,1279.05 2145,1156.37 2135,1146.37 2135,840 2340,635 2390,635 2510,755 2945,755 2965,735 2965,623.66 R31.2 S6.8@2905,422.48
PD9: U3.56
PD10: U3.57
PD11: U3.58
PD12: OE0.3 U3.60 U6.3 | length 4414.3
  Top Layer w10: OE0.3 1434.41,3485.59 U6.3 1710.59,3485.59 1895,3670 3120,3670 3180,3610 3180,2670 3165,2655 3062.63,2655 2951.63,2544 2855,2544 2735,2424 2735,2111.31 2359.35,1735.65 2359.35,1674.35 2309.73,1624.73 U3.60
PD13: C4.1 R28.2 S2.1 U3.62 | length 1579.2
  Top Layer w10: U3.62 2228.6,1667.78 2268.85,1667.78 2560,1958.93 C4.1 2605,2190 2605,2392.99 R28.2 2567.01,2445 v1(2635,2445) ; S2.1 2355,2675 v1(2425,2605)
  Bottom Layer w10: v1(2425,2605) 2545,2605 2545,2604.09 2580.4,2568.69 2608.69,2568.69 2659,2518.37 2659,2469 v1(2635,2445)
PD14: OLED.1 U3.64 | length 7128
  Top Layer w10: U3.64 2281.09,1703.47 2495,1917.37 v1(2495,1980)
  Bottom Layer w10: OLED.1 410,3515 610,3715 3455,3715 3565,3605 3565,2997.41 3436.79,2869.2 3420.58,2869.2 3231,2679.61 3231,2083.37 3156.63,2009 2524,2009 v1(2495,1980)
PE1: MOTOR1.3 U3.8 | length 4047.6
  Top Layer w10: v1(1095,1835) 1070,1810 1070,1755 1085,1740 1485,1740 1527.21,1782.21 U3.8
  Bottom Layer w10: v1(1095,1835) 990,1940 990,2005 1050,2065 1210,2065 1255,2110 1255,2290 1520,2555 1520,3615 1600,3695 2490,3695 MOTOR1.3
PE2: MOTOR1.4 U3.89 | length 2354.4
  Top Layer w10: U3.89 1890.28,2180 v1(1900,2189.72)
  Bottom Layer w10: v1(1900,2189.72) 2224.72,2189.72 2280,2245 2280,3095 2425,3240 2720,3240 2750,3270 2750,3535 MOTOR1.4
PE3: OLED.4
PE5: MOTOR0.3 U3.94 | length 2463.7
  Top Layer w10: U3.94 1791.85,2053.15 1719,2126 1549,2126 1526,2149 1526,2423.37 1540.63,2438 1603,2438 1645,2480 1645,2770 1690,2815 1745,2815 1755,2825 1755,2905 1690,2970 1690,3175 1810,3295 1877.37,3295 1938.37,3234 2051,3234 2322,3505 MOTOR0.3
PE6: MOTOR0.4 U3.95 | length 2540.7
  Top Layer w10: U3.95 1772.17,2042.83 1705,2110 1540,2110 1510,2140 1510,2430 1534,2454 1594,2454 1626,2486 1626,2769 1606,2789 1606,3221 1730,3345 1850,3345 1945,3250 2035,3250 MOTOR0.4
PE7: OE1.3 U3.96 U6.11 | length 2099.9
  Top Layer w10: U3.96 1752.48,2038.98 1697.46,2094 1649,2094 1615,2060 1550,2060 1490,2120 1490,2435 1525,2470 1585,2470 1610,2495 1610,2760 1590,2780 1590,3230 1770,3410 1770,3445 1785,3460 U6.11 1950,3460 OE1.3
PE8: U3.9
PE9: U3.10
PE11: U3.13
PE12: U3.76 U6.13 | length 2770.4
  Top Layer w10: v1(1450,2390) 1450,2440 1594,2584 1594,2753.37 1574,2773.37 1574,3236.63 1655,3317.63 1655,3405 1761.18,3511.18 U6.13 ; U3.76 2146.18,2055 2181.18,2090 v1(2255,2090)
  Bottom Layer w10: v1(1450,2390) 1503.94,2390 1554.47,2339.47 1711.79,2339.47 1735.53,2363.21 1735.53,2380.53 1775.53,2420.53 1811.79,2420.53 1835.53,2396.79 1835.53,2362.69 1793.37,2320.53 1778.21,2320.53 1745,2287.31 1745,2245 1764,2226 1824.91,2226 1846,2204.91 1846,2159 1896,2109 2035.09,2109 2055.09,2089 2254,2089 v1(2255,2090)
PH9: P1.5 R30.5 U3.88 | length 716.4
  Top Layer w10: R30.5 1787.01,2581.53 1988.54,2380 P1.5 1936.31,2321.31 1936.31,2108.69 1909.96,2082.33 U3.88
PH10: P1.10 R30.7 U3.81 | length 828.3
  Top Layer w10: R30.7 1754.47,2588.96 1754.47,2320.53 P1.10 ; U3.81 2047.76,2102.76 v1(2070,2125)
  Bottom Layer w10: P1.10 1862,2213 1862,2168 1905,2125 v1(2070,2125)
R\E\S\E\T\: P1.9 R15.1 R17.2 U3.17 | length 3760.6
  Top Layer w10: v1(1230,1945) 1156,1871 1076,1871 1040,1835 815,1835 775,1795 775,1750 795,1730 915,1730 975,1670 975,1667.54 1462.54,1667.54 1525.04,1605.04 U3.17 ; R17.2 R15.1 1771,3052.34 1771,2818.37 1751.63,2799 1696.63,2799 1661,2763.37 1661,2452.37 1640,2431.37 1640,2365 1684.47,2320.53 1711.79,2320.53 1735.53,2296.79 1735.53,2282.16 1787.69,2230 1810,2230 1835.53,2255.53 1835.53,2297.31 1835,2297.84 1835,2340 P1.9
  Bottom Layer w10: v1(1230,1945) 1285,2000 1285,2280 1325.53,2320.53 1735.06,2320.53 1744.53,2330 1745,2330 P1.9
VDD_HV_ADC: C23.2 L2.2 U3.52 | length 504.6
  Top Layer w10: U3.52 2225.83,1466.34 C23.2 2435,1411.34 v1(2435,1255)
  Bottom Layer w10: L2.2 2398.66,1291.34 v1(2435,1255)
VDD_LV: C14.2 C15.2 C16.2 U3.19 U3.32 U3.85 | length 1744.6
  Top Layer w10: v1(1165,1555) 1171.99,1561.99 1591.32,1561.99 U3.19 1674.33,1565.67 v1(1775,1465) 1791.85,1448.15 U3.32 ; v1(1850,1845) 1900,1895 1925,1895 1969.02,1939.02 U3.85
  Bottom Layer w10: v1(1165,1555) 1383.84,1555 C14.2 ; v1(1775,1465) 1775,1518.66 C15.2 1830,1573.66 1830,1700 1850,1720 v1(1850,1845) 1856.34,1851.34 C16.2
VSS_HV_ADC: C23.1 L3.2 U3.51 | length 370.9
  Top Layer w10: v1(2190,1395) 2190,1412.64 U3.51 2257.44,1447.56 2321.34,1383.66 C23.1
  Bottom Layer w10: v1(2190,1395) 2190,1336.34 L3.2
XTAL: C7.2 R16.2 U3.34 Y1.1 | length 454.2
  Top Layer w10: U3.34 1831.22,1300 v1(1850,1280)
  Bottom Layer w10: C7.2 1785,1202.17 Y1.1 1780,1210 v1(1850,1280) 1803.66,1326.34 R16.2
pads on no net: OLED.0 P1.7 U3.2 U3.5 U3.6 U3.11 U3.25 U3.26 U3.66 U3.71 U3.77 U3.78 U3.79 U3.80 U3.90 U3.92 U3.93 U3.99 U4.1 U4.7 U6.2 U6.12 WIFI.0 WIFI.5 WIFI.6 WIFI.11 WIFI.12 WIFI.13 WIFI.14

## Polygon pours and split planes (outlines as drawn)
GND on Bottom Layer "Bottom Layer-No Net" (solid, remove dead copper, shelved, pour order 4): 1465,4075 3850,4075 3860,4065 4360,3565 4360,3420 4360,15 4105,-240 3925,-420 3425,-420 -85,-420 -105,-400 -815,310 -815,330 -815,3630 -645,3800 -240,4205 -240,4250 1700,4250 1870,4080 1875,4075 1920,4075
GND on Top Layer "Bottom Layer-No Net" (solid, remove dead copper, shelved, pour order 2): -80,4120 -45,4155 3910,4155 3910,4080 4405,3585 4265,3445 4265,75 4130,75 3655,-400 3610,-445 -5,-445 -75,-445 -705,185 -660,230 -660,3650 -545,3650 -40,4155

## Keep-outs
Keep-Out Layer:
  lines w10: 0,0 3475,0 3590,115 3590,3740.16 0,3740.16 0,0

## Text inside footprints (layer, text, board x,y; h text height)
EMS0&1: Top Overlay "1" at 2695,1560 h50; Top Overlay "2" at 2675,1660 h50; Top Overlay "4" at 2935,1660 h50; Top Overlay "3" at 2935,1560 h50